# EAGLE board Raspberry Pi 2 shield power (EAGLE 6.1)
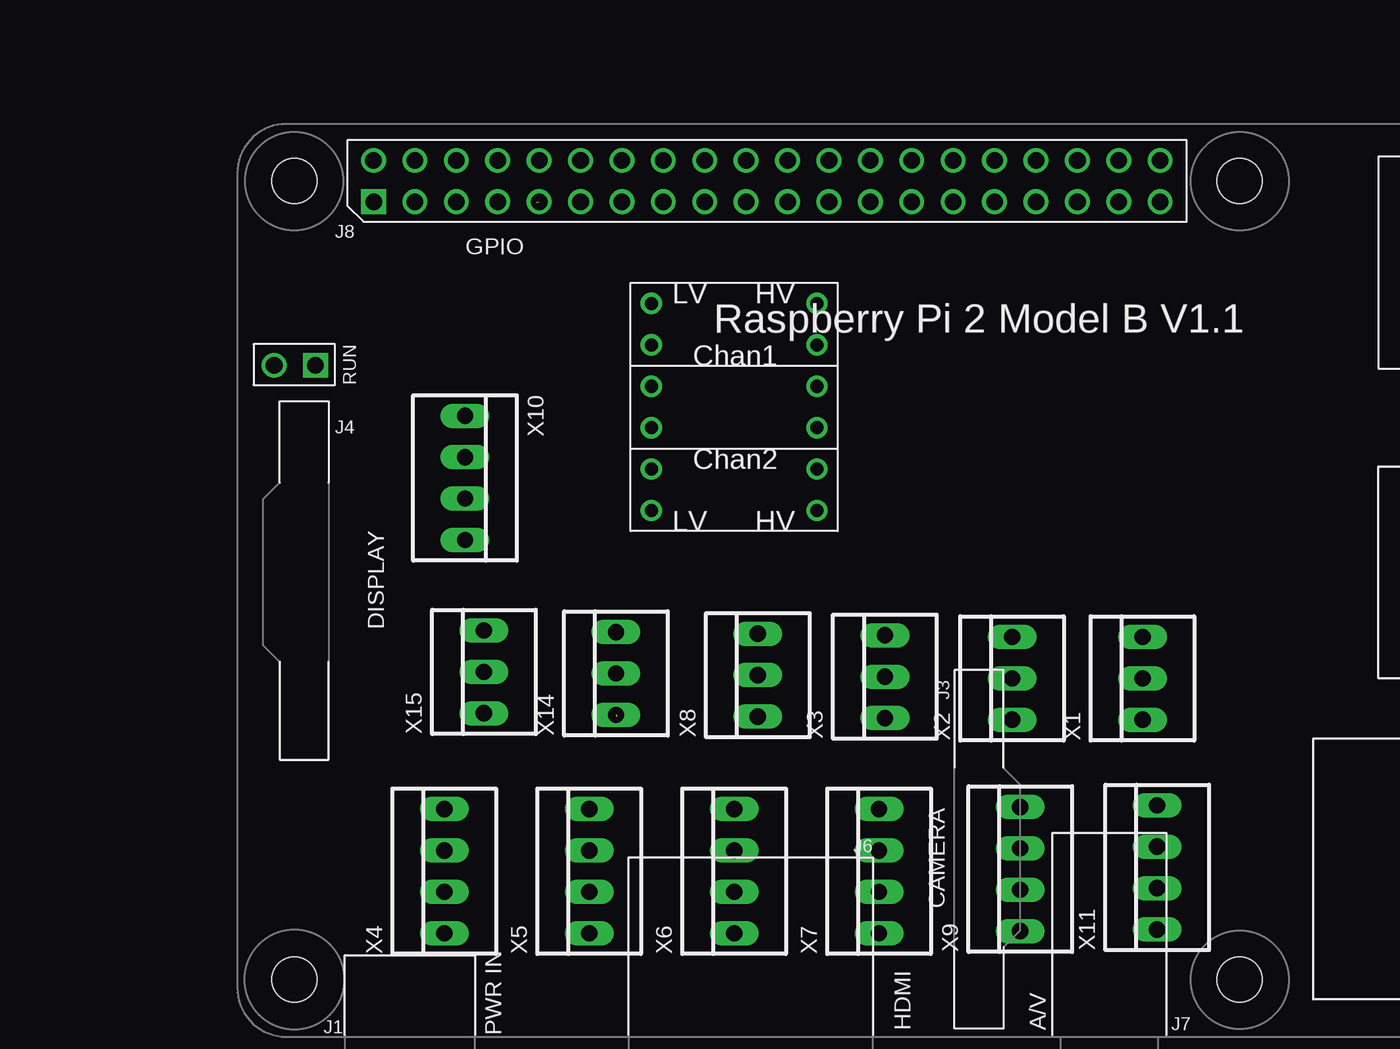
[diagram p0: board, top side]
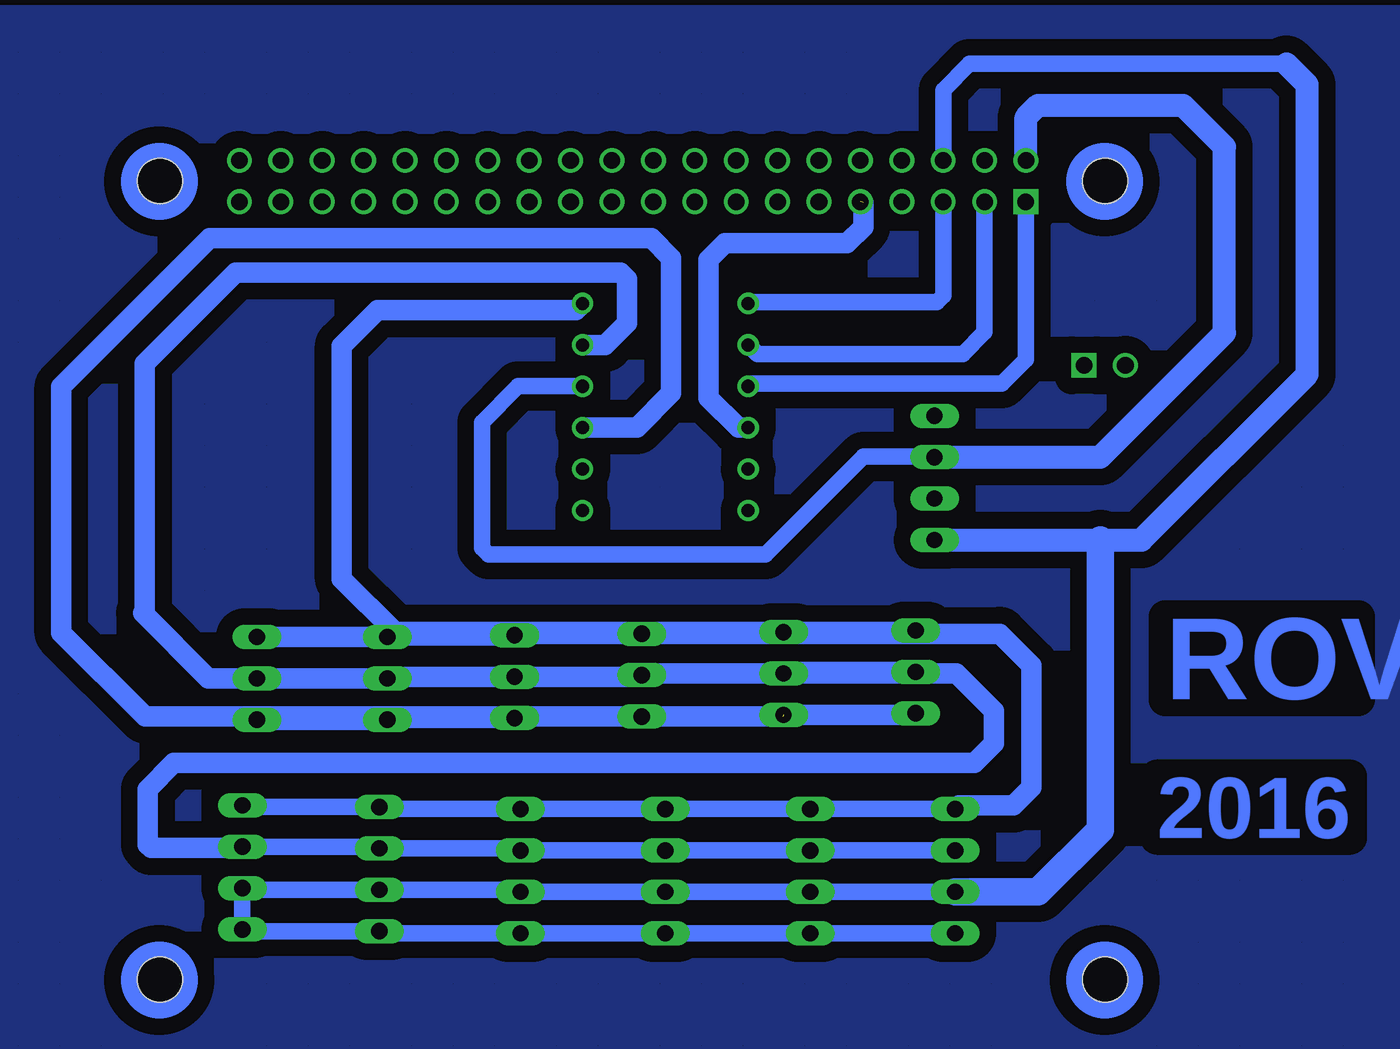
[diagram p1: board, bottom side, seen from below]

No outline drawn. Coordinates in mm, seen from the top.
Copper layers (1*16): Top 0.035mm / dielectric 1.5mm / Bottom 0.035mm
Design rules: minimum track width 10mil, minimum drill 24mil, track to track 8mil, track to pad 8mil, pad to pad 8mil, via to via 8mil, smd to smd 8mil, copper to edge 40mil, drill to drill 8mil, minimum pad ring 10mil, minimum via ring 8mil, stop-mask expansion 4mil, vias tented up to drill 0mil, thermal gap 10mil

## Footprints (pad centres in the part's own frame; a part is rotated, then mirrored left to right if it is on the bottom)
RPI2 = drill 1.016 square: P$1 8.37,51.23; P$41 4.8,41.2 | drill 1.016: P$2 8.357,53.772; P$3 10.897,51.232; P$4 10.897,53.772; P$5 13.437,51.232; P$6 13.437,53.772; P$7 15.977,51.232; P$8 15.977,53.772; P$9 18.517,51.232; P$10 18.517,53.772; P$11 21.057,51.232; P$12 21.057,53.772; P$13 23.597,51.232; P$14 23.597,53.772; P$15 26.137,51.232; P$16 26.137,53.772; P$17 28.677,51.232; P$18 28.677,53.772; P$19 31.217,51.232; P$20 31.217,53.772; P$21 33.757,51.232; P$22 33.757,53.772; P$23 36.297,51.232; P$24 36.297,53.772; P$25 38.837,51.232; P$26 38.837,53.772; P$27 41.377,51.232; P$28 41.377,53.772; P$29 43.917,51.232; P$30 43.917,53.772; P$31 46.457,51.232; P$32 46.457,53.772; P$33 48.997,51.232; P$34 48.997,53.772; P$35 51.537,51.232; P$36 51.537,53.772; P$37 54.077,51.232; P$38 54.077,53.772; P$39 56.617,51.232; P$40 56.617,53.772; P$42 2.26,41.2 | hole 2.75: 3.5,3.5; 61.5,3.5; 3.5,52.5; 61.5,52.5
LOGIC_LEVEL_CONVERTER = drill 0.8: P$1 1.27,13.97; P$2 1.27,11.43; P$3 1.27,8.89; P$4 1.27,6.35; P$5 1.27,3.81; P$6 1.27,1.27; P$7 11.43,1.27; P$8 11.43,3.81; P$9 11.43,6.35; P$10 11.43,8.89; P$11 11.43,11.43; P$12 11.43,13.97
22-23-2031 = drill 1 long: 1 -2.54,0; 2 0,0; 3 2.54,0
22-23-2041 = drill 1 long: 1 -3.81,0; 2 -1.27,0; 3 1.27,0; 4 3.81,0

## Placement (x,y rotation side)
PCB1  RPI2  [RPI2]  23.17,8.81 0 top
U$2  LOGIC_LEVEL_CONVERTER  [LOGIC_LEVEL_CONVERTER]  47.3,39.83 0 top
X1  22-23-2031  [22-23-2031]  78.7,30.8 90 top
X2  22-23-2031  [22-23-2031]  70.7,30.8 90 top
X3  22-23-2031  [22-23-2031]  62.9,30.9 90 top
X4  22-23-2041  [22-23-2041]  35.87,18.97 90 top
X5  22-23-2041  [22-23-2041]  44.76,18.97 90 top
X6  22-23-2041  [22-23-2041]  53.65,18.97 90 top
X7  22-23-2041  [22-23-2041]  62.54,18.97 90 top
X8  22-23-2031  [22-23-2031]  55.1,31 90 top
X9  22-23-2041  [22-23-2041]  71.2,19.1 90 top
X10  22-23-2041  [22-23-2041]  37.14,43.1 270 top
X11  22-23-2041  [22-23-2041]  79.6,19.2 90 top
X14  22-23-2031  [22-23-2031]  46.4,31.1 90 top
X15  22-23-2031  [22-23-2031]  38.3,31.2 90 top

## Library data of the parts
PCB1 = e14_Rpi2_RevA
U$2 = SparkFun-Boards
X1-X3 X8 X14 X15 = con-molex; MF: MOLEX; MPN: 22-23-2031; OC_FARNELL: 1462950; OC_NEWARK: 30C0862
X4-X7 X9-X11 = con-molex; MF: MOLEX; MPN: 22-23-2041; OC_FARNELL: 1462920; OC_NEWARK: 38C0355

## Nets
N$1: PCB1.P$5 U$2.P$1
N$2: U$2.P$9 X1.1 X2.1 X3.1 X8.1 X14.1 X15.1
N$4: PCB1.P$3 U$2.P$2
N$5: PCB1.P$1 U$2.P$3
N$8: PCB1.P$2 U$2.P$10 X10.2
N$9: U$2.P$12 X1.3 X2.3 X3.3 X4.4 X5.4 X6.4 X7.4 X8.3 X9.4 X11.4 X14.3 X15.3
N$11: U$2.P$11 X1.2 X2.2 X3.2 X4.3 X5.3 X6.3 X7.3 X8.2 X9.3 X11.3 X14.2 X15.2
N$12: PCB1.P$6 X4.1 X4.2 X5.1 X5.2 X6.1 X6.2 X7.1 X7.2 X9.1 X9.2 X10.4 X11.1 X11.2
N$14: PCB1.P$9 U$2.P$4

## Tracks (layer width: path | path; a pad name or v marks a point on that pad's centre or on a via)
N$1
  Bottom 1.016: PCB1.P$5 36.61,54.29 37,53.9 48.47,53.9 U$2.P$1
N$2  (1 unrouted)
  Bottom 1.27: X8.1 62.8,28.46 X3.1 70.6,28.36 X2.1 X1.1 | X8.1 46.44,28.46 46.3,28.6 | X14.1 38.4,28.56 X15.1 | X8.1 85.56,28.46 90.7,33.6 90.7,48.7 81.6,57.8 54.5,57.8 53.3,56.6 53.3,48.3 55.4,46.2 58.71,46.2 U$2.P$9
N$3
  pour Bottom (isolate 1.016, hatched): 7.5,71.5 94.5,71.5 94.5,7 7.5,7
N$4
  Bottom 1.016: PCB1.P$3 34.07,52.03 35.4,50.7 48.01,50.7 U$2.P$2
N$5
  Bottom 1.016: PCB1.P$1 31.54,50.36 33,48.9 48.39,48.9 U$2.P$3
N$8
  Bottom 1.016: U$2.P$10 62.68,48.72 64.9,46.5 64.9,38.8 64.5,38.4 47.5,38.4 41.5,44.4 37.17,44.4 X10.2
  Bottom 1.422: PCB1.P$2 31.53,65.22 30.79,65.96 21.9,65.96 19.36,63.42 19.36,51.99 26.98,44.37 X10.2
N$9
  Bottom 1: X7.4 X6.4 X5.4 X4.4
  Bottom 1.016: X7.4 71.07,22.78 X9.4 79.5,22.91 X11.4
  Bottom 1.27: X15.3 38.4,33.64 X14.3 55,33.64 | 55,33.64 X8.3 | X8.3 62.8,33.54 X3.3 70.6,33.44 X2.3 X1.3 | X8.3 33.14,33.54 31.2,31.6 31.2,24.1 32.3,23 35.65,23 X4.4 | 55,33.64 70.24,33.64 73.5,36.9 73.5,51.2 71.3,53.4 59.13,53.4 U$2.P$12
N$11
  Bottom 1: X4.3 X5.3 X6.3 X7.3
  Bottom 1.016: X11.3 71.3,20.47 X9.3 62.67,20.37 X7.3
  Bottom 1.27: X15.2 46.3,31.2 X14.2 | X14.2 55,31.1 X8.2 55.2,30.9 X3.2 71.2,30.9 71.3,30.8 | 71.3,30.8 X1.2 81.7,30.8 85.7,34.8 85.6,34.9 85.6,50.1 80,55.7 56.4,55.7 56,55.3 56,52.6 57.34,51.26 U$2.P$11 | 71.3,30.8 X2.2 | X14.2 35.8,31.1 33.5,28.8 33.5,26.8 34.7,25.6 83.8,25.6 85.4,24 85.4,20.6 85.2,20.4 79.67,20.4 X11.3
N$12
  Bottom 0.406: X4.1 34.6,15.16
  Bottom 1: X7.1 X6.1 X5.1 X4.1 | X4.2 X5.2 X6.2 X7.2
  Bottom 1.016: 15.55,68.5 35,68.5 36.6,66.9 PCB1.P$6 | X7.2 62.67,17.83 X9.2 80.33,17.83 80.5,18 79.67,18 X11.2 X11.1 79.5,15.29 X9.1 71.07,15.16 X7.1
  Bottom 1.422: X10.4 26.98,39.29 24.44,39.29 14.28,49.45 14.28,67.23 15.55,68.5
  Bottom 1.676: X4.2 30.79,17.7 26.98,21.51 26.98,39.29
N$14  (1 unrouted)
  Bottom 1.27: U$2.P$4 49.18,46.18 51,48 51,56.5 50,57.5 42.5,57.5 41.5,58.5 41.5,60
(copper drawn outside any net)
  shapes: Bottom circle x4

## Text on the board
Bottom: ROV | 2016